# Altium PCB Template.PcbDoc
Units mm, origin at the board's own origin, x right, y up, seen from the top; angles counter-clockwise.
Board outline 44 x 44 mm, 2 copper layers (Top Layer, Bottom Layer), stack 1.571 mm thick; 8 components, 44 nets, 68 pads, 0 vias.
Unrouted connection lines stored in the file: 19.
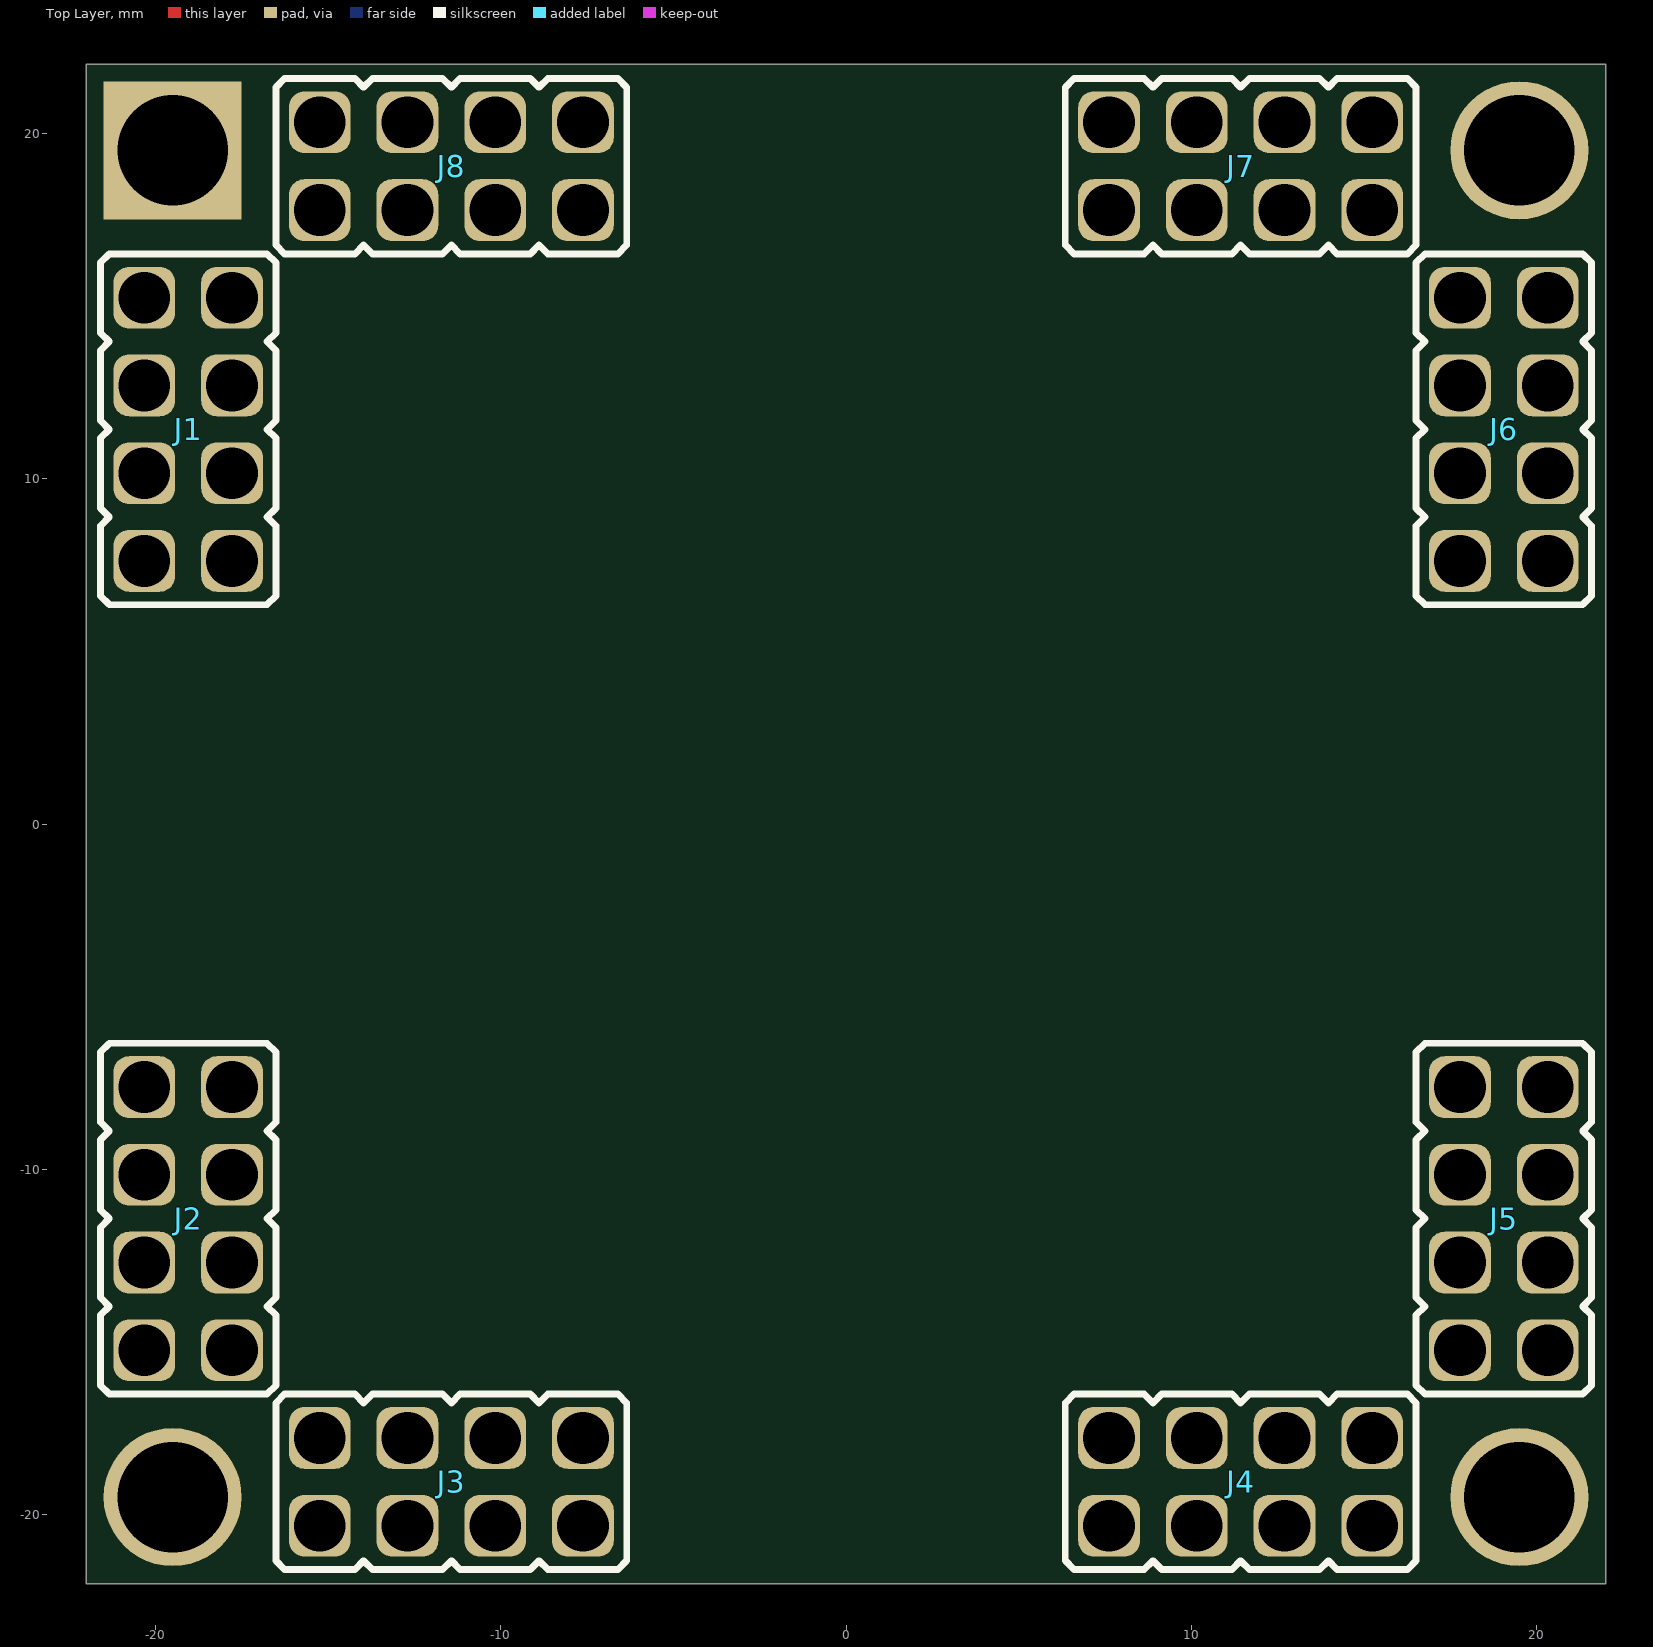
[diagram p0: Top Layer view]
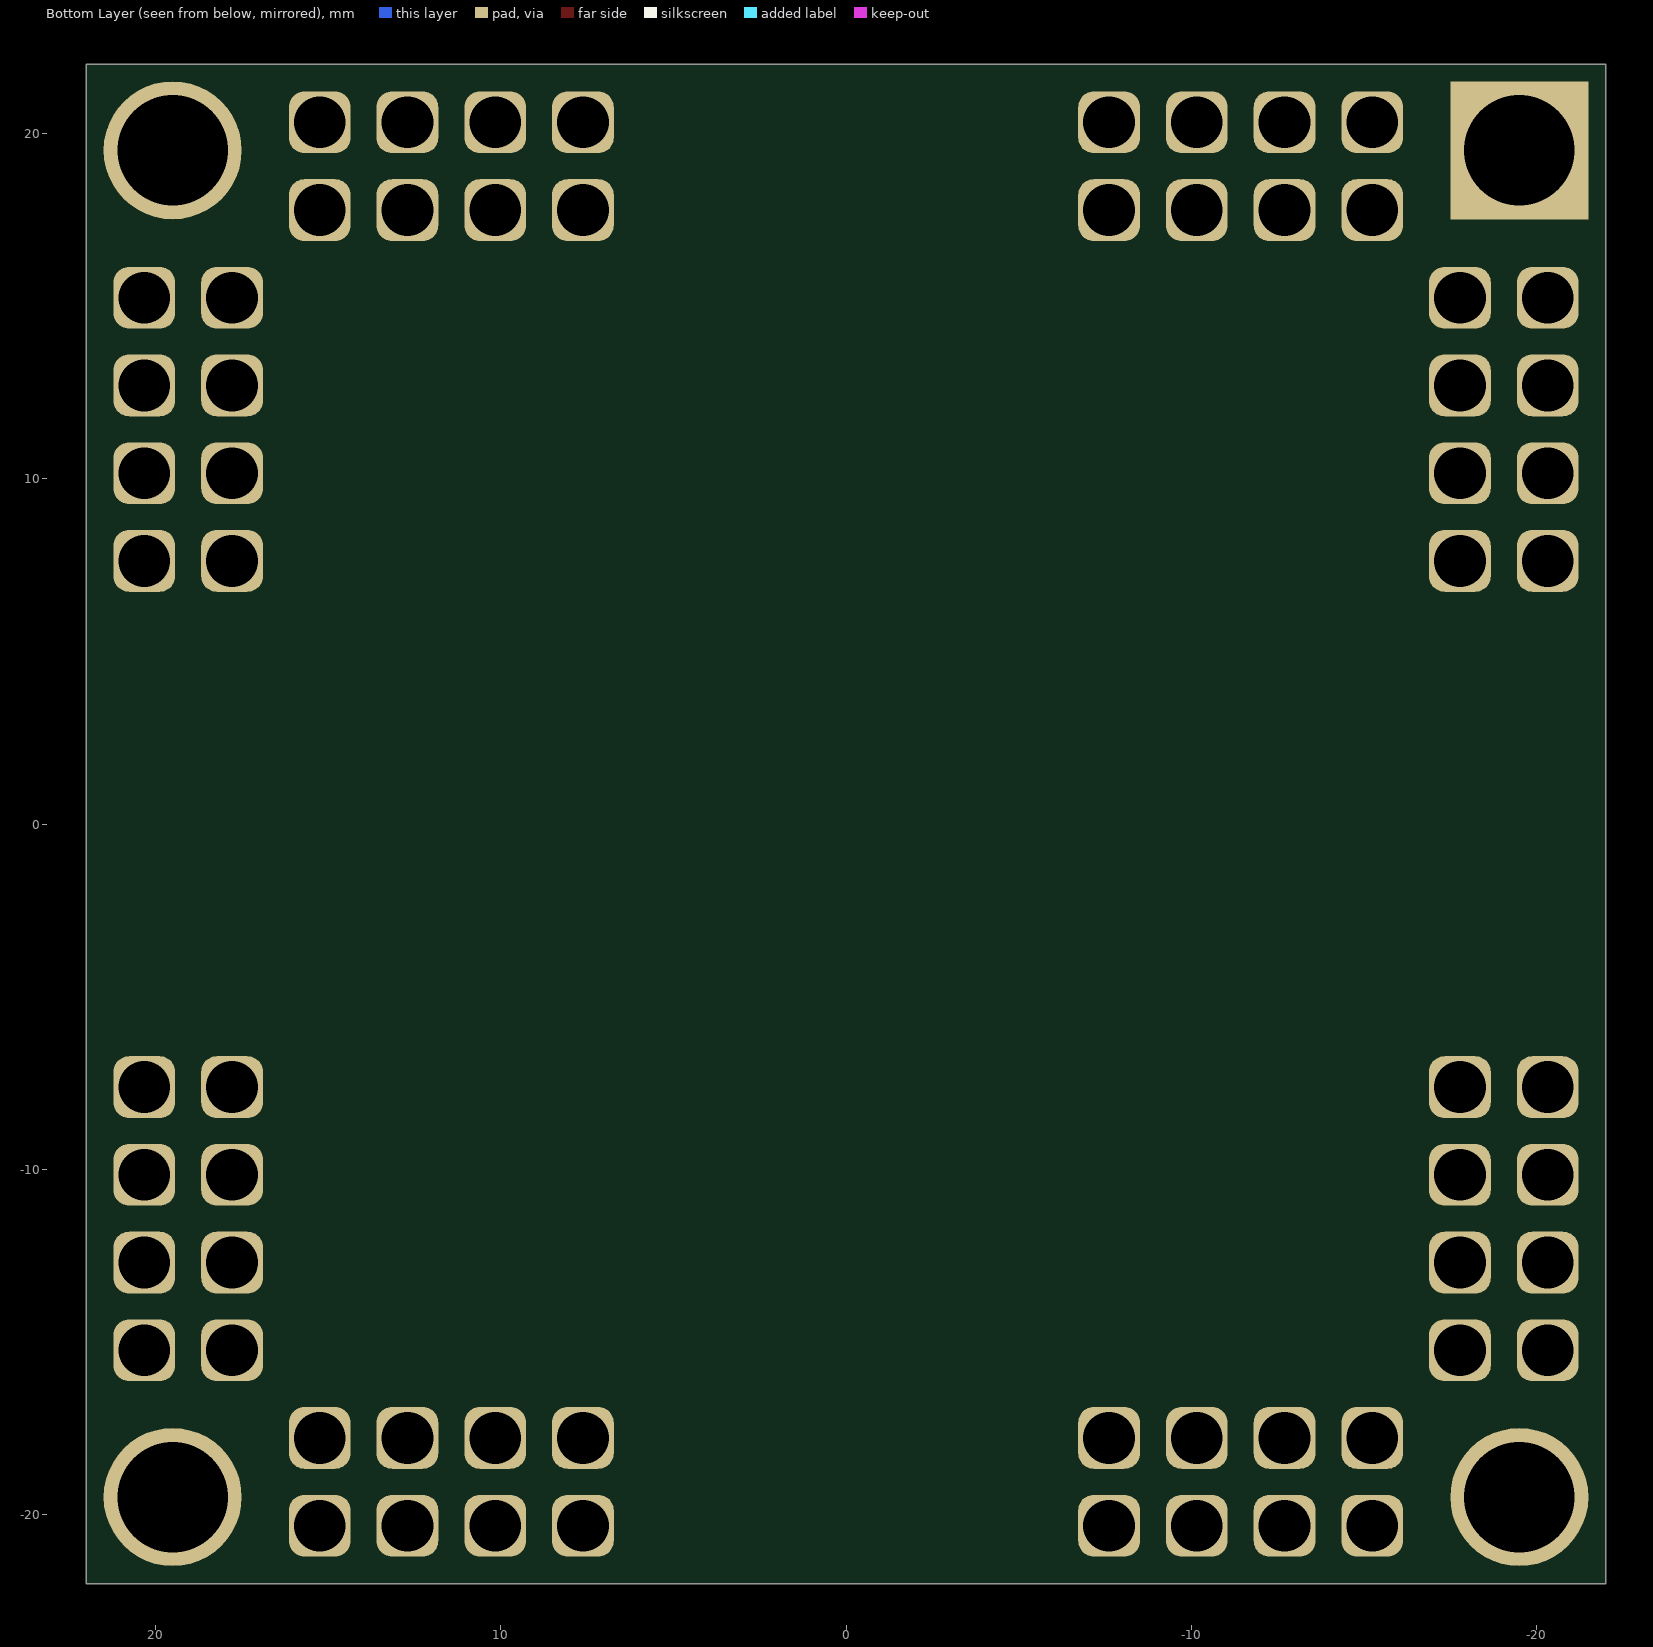
[diagram p1: Bottom Layer view, seen from below]

## Layer stack, top to bottom
Top Solder: solder mask 0.0102, Solder Resist, Dk 3.5
Top Layer: signal copper 0.0356
Dielectric 1: dielectric 1.5, FR-4, Dk 4.8
Bottom Layer: signal copper 0.0356
Bottom Solder: solder mask 0.0102, Solder Resist, Dk 3.5

## Board outline
-22,-22 -22,22 22,22 22,-22

## Design rules (kind name [scope] priority, off if disabled: settings)
Clearance Clearance_Text_Polygon(GND) [InPolygon and InNet('GND') vs IsText] p1: gap=0
Clearance Clearance_Track(GND)_Polygon(GND) [InPolygon and InNet('GND') vs IsTrack and InNet('GND')] p2: gap=0
Clearance Clearance_All_Polygon(GND) [InPolygon and InNet('GND')] p3: gap=0.5
Clearance [All] p4: gap=0.25
HoleSize [All] p1: absolutevalues=TRUE maxlimit=4 minlimit=0.3 maxpercent=80.000 minpercent=20.000
PolygonConnect PolygonConnect_Via(GND) [InNet('GND') vs IsVia] p1: connectstyle=Direct reliefconductorwidth=0.254 reliefentries=4 polygonreliefangle="90 Angle" airgapwidth=0.254
PolygonConnect [All] p2: connectstyle=Relief reliefconductorwidth=0.254 reliefentries=4 polygonreliefangle="90 Angle" airgapwidth=0.254
RoutingVias [All] p1: holewidth=0.5 width=1 viastyle="Through Hole" minholewidth=0.5 minwidth=1 maxholewidth=1.5 maxwidth=2
ShortCircuit ShortCircuit_Text_Polygon(GND) [IsText vs InPolygon and InNet('GND')] p1: allowed=TRUE
ShortCircuit [All] p2: allowed=FALSE
SolderMaskExpansion [All] p1: expansion=0.102
Width [All] p1: maxlimit=2 minlimit=0.25 preferedwidth=0.3
27 further rules are at their usual default settings.

## Components (designator, comment, footprint, x,y, rotation, side; value= is the part's Value field where it differs from the comment)
J1 "LEFT" PBDM-8 -19.05,11.43 r270 top
J2 "LEFT" PBDM-8 -19.05,-11.43 r270 top
J3 "BOTTOM" PBDM-8 -11.43,-19.05 r0 top
J4 "BOTTOM" PBDM-8 11.43,-19.05 r0 top
J5 "RIGHT" PBDM-8 19.05,-11.43 r90 top
J6 "RIGHT" PBDM-8 19.05,11.43 r90 top
J7 "TOP" PBDM-8 11.43,19.05 r180 top
J8 "TOP" PBDM-8 -11.43,19.05 r180 top

## Footprints (in the part's own frame and the unit in brackets; to place one, negate y for a bottom-side part, rotate by r counter-clockwise, add the part's x,y. Pads: shape width x height; smd on the part's side, far side on the other; paste and mask are expansions set on the pad)
PBDM-8 [mm] "5-pin interboard connector, pitch 2.54 mm"
  rrect50% 1.79x1.79 hole 1.5: 1(-3.81,-1.27) 2(-3.81,1.27) 3(-1.27,-1.27) 4(-1.27,1.27) 5(1.27,-1.27) 6(1.27,1.27) 7(3.81,-1.27) 8(3.81,1.27)
  silkscreen extent -5.08,-2.54 5.08,2.54, body extent -5.08,-2.54 5.08,2.54, height 3

## Part data
J1 J2 J3 J4 J5 J6 J7 J8: library part PBDM-8, "2x4-pin header, pitch 2.54 mm"

## Free pads (board coordinates)
  round 4 hole 3.2: 0(-19.5,-19.491) 0(19.5,-19.491) 0(19.5,19.509)
  rect 4x4 hole 3.2: 0(-19.5,19.509)

## Nets (pads, with @x,y where several pads share a name; then routed paths per layer and width w, separated by ;. In a path a pad name is that pad's centre, name@x,y a point inside that pad or via, vN(x,y) a via of type N, cw(c..) or ccw(c..) an arc to the next point about the centre after c; other vN are vias at no path point)
+5V: J1.6 J3.6 J5.6 J7.6
+12V: J1.2 J3.2 J5.2 J7.2
BOOT0: J4.3
GND: J2.8 J4.8 J6.8 J8.8 pad.0
PA0/ADC12_IN0: J2.4
PA1/ADC12_IN1: J2.3
PA2/USART2_TX: J2.6
PA3/USART2_RX: J2.5
PA4/SPI1_NSS: J3.1
PA5/SPI1_SCK: J3.3
PA6/SPI1_MISO: J3.5
PA7/SPI1_MOSI: J3.7
PA8/MCO: J6.1
PA9/USART1_TX: J6.6
PA10/USART1_RX: J6.5
PA11/USBDM: J6.2
PA12/USBDP: J6.4
PA13/SWDIO: J6.3
PA14/SWCLK: J8.1
PA15/(SPI1_NSS): J7.1
PB0/ADC12_IN8: J4.2
PB1/ADC12_IN9: J4.1
PB2/BOOT1: J4.4
PB3/(SPI1_SCK): J7.3
PB4/(SPI1_MISO): J7.5
PB5/(SPI1_MOSI): J7.7
PB6/I2C1_SCL/(USART1_TX): J8.6
PB7/I2C1_SDA/(USART1_RX): J8.5
PB8/(I2C1_SCL/CANRX): J8.3
PB9/(I2C1_SDA/CANTX): J8.4
PB10/USART3_TX/I2C2_SCL: J4.6
PB11/USART3_RX/I2C2_SDA: J4.5
PB12/SPI2_NSS: J5.1
PB13/SPI2_SCK: J5.3
PB14/SPI2_MISO: J5.5
PB15/SPI2_MOSI: J5.7
PC13: J1.3
PC14: J1.5
PC15: J1.7
PD0: J2.2
PD1: J2.1
VBAT: J1.4 J3.4 J5.4 J7.4
VBKUP: J1.1
VCC: J1.8 J3.8 J5.8 J7.8
pads on no net: J2.7 J4.7 J6.7 J8.2 J8.7

## Silkscreen, mask and mechanical layers (free items; w line width, h text height)
Board:
  the board outline again, w0.2